# Altium PCB ZCTX-31main190715.PcbDoc (part 2 of 2)
Units mil, origin at the board's own origin, x right, y up, seen from the top; angles counter-clockwise.
Board outline 3653.54 x 5905.51 mil, 4 copper layers (Top Layer, GND, Mid-Layer 1, Bottom Layer); 117 components, 93 nets, 498 pads, 925 vias.
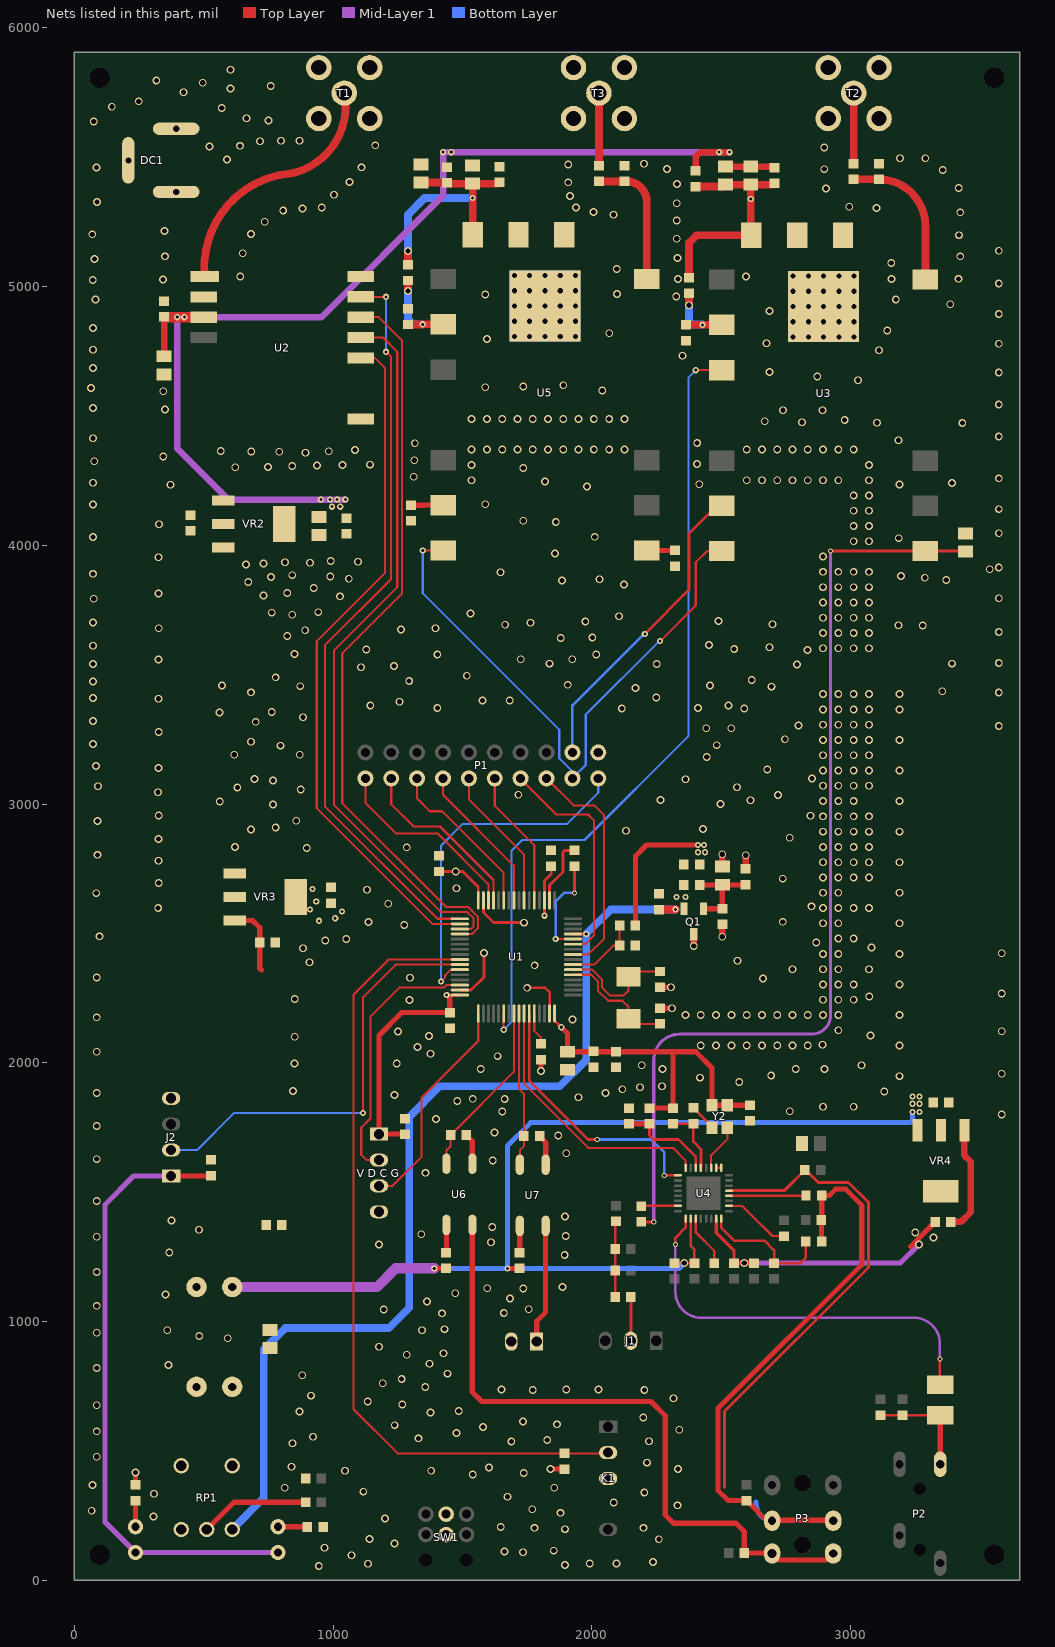
[diagram p4: the nets of this part, all layers, seen from the top]

## Via types
v1: diameter 30, hole 20, Top Layer to Bottom Layer, tented both sides, 854 vias
v2: diameter 24, hole 12, Top Layer to Bottom Layer, 61 vias
v3: diameter 20, hole 12, Top Layer to Bottom Layer, tented both sides, 10 vias

## Nets (pads, with @x,y where several pads share a name; then routed paths per layer and width w, separated by ;. In a path a pad name is that pad's centre, name@x,y a point inside that pad or via, vN(x,y) a via of type N, cw(c..) or ccw(c..) an arc to the next point about the centre after c; other vN are vias at no path point) (continued)
GND: "V D C G.4" C1.1 C2.1 C3.2 C4.1 C5.1 C6.1 C7.2 C8.1 C9.2 C10.2 C11.2 C12.2 C13.2 C14.1 C16.1 C17.1 C18.2 C26.1 C27.1 C29.1 C30.1 C31.2 C36.2 C37.2 C38.2 C39.1 C40.2 C41.2 C42.2 C43.2 C44.2 C45.2 C46.2 C47.2 C49.2 C51.1 C54.1 C55.1 C56.1 C57.2 C58.1 C59.1 Cp1.1 Cp2.1 DC1.2 DC1.3 J2.4 K1.3 P1.20 Q1.3 R3.1 R4.2 R8.2 R10.2 R11.1 R18.1 R19.1 R21.1 RP1.11 S1.2 SW1.2 SW1.5 T1.2 T2.2 T3.2 U1.18 U1.31 U1.47 U1.63 U2.2 U2.9 U2.16 U3.9 U3.10 U5.9 U5.10 U6.3 U7.3 VR2.1 VR3.1 VR4.1 Y2.2 | length 2310.7
  Top Layer w10: v1(1750,2290) 1820,2290 1836.61,2273.39 U1.63@1836.61,2190.94 ; C26.1@2392,1826.31 2464.47,1753.84 Y2.2@2464.47,1749.69
  Top Layer w11: U1.47@1490.16,2281.5 1533.46,2281.5 1583,2331.03 v1(1583,2425) ; U1.31@1580.71,2627.95 1580.71,2580.71 1619.42,2542 v1(1738,2542) ; U1.18@1836.61,2627.95 1836.61,2686.7 1888,2738.09 1888,2815.61 1893.71,2821.32 R8.2@1933,2821.32
  Top Layer w20: R18.1@236.22,368.9 v1(236.22,417.32) ; C44.2@1514.57,1720.47 1538.19,1696.85 1538.19,1673.23 U6.3@1538.19,1610.24 ; C47.2@1798.03,1716.54 1821.65,1692.91 1821.65,1673.23 ; v1(1803.15,1968.5) R4.2@1803.15,2012.99 ; U7.3@1821.65,1606.3 1821.65,1673.23 ; 1822.83,1673.23 1821.65,1673.23 ; v1(1839.76,430.31) C4.1@1893.7,430.31 ; Cp2.1@2263.78,2211.42 v1(2309.84,2211.42) ; Cp1.1@2263.78,2292.52 v1(2305.91,2292.52)
  Top Layer w25: v1(2394.02,2451.82) Q1.3@2394.02,2497.09 ; v1(2504.26,2487.25) R3.1@2504.26,2535.68 ; C6.1@2504.26,2758.51 v1(2504.26,2806.15) ; C17.1@2515.75,5464.17 C18.2@2614.17,5464.17 ; C5.1@2594.81,2749.85 v1(2594.81,2802.21) ; 2676.77,5464.17 C18.2@2614.17,5464.17 ; C41.2@2706,5459.32 2701.14,5464.17 C18.2@2614.17,5464.17 ; C42.2@3387.31,1385.45 3426.45,1385.45 3464,1423 3464,1618 3439.67,1642.33 VR4.1@3439.67,1739.78
  other v1: 945,56 1896,59 1135,64 1992,65 2095,65 2236,71 1071,97 1734,109 1662,112 1853,115 967,126 1237,143 2259,159 1141,160 1896,198 1778,203 2200,203 1648,206 1201,239 306,247 1879,261 67,269 1770,275 2331,290 2085,301 1674,323 308,335 2203,340 1117,343 813,358 1855,358 70,369 1540,409 1737,415 1046,424 1379,424 2333,431 1603,436 839,439 2213,455 87,478 843,530 1689,537 2221,538 1828,543 1330,549 922,555 1477,570 87,576 2338,582 1579,593 1238,600 1865,603 1734,614 2199,630 1377,649 870,653 1486,655 87,677 1267,680 1134,691 2316,704 915,714 1772,736 2203,736 1651,738 1901,738 2026,738 1356,747 1192,762 1265,778 881,793 1442,799 87,821 364,832 1373,837 1285,872 1427,878 1177,903 593,936 483,944 87,957 359,967 1344,967 1431,971 1421,1032 1660,1033 1196,1047 1756,1048 87,1061 1363,1078 1684,1089 352,1105 1472,1110 1735,1128 1596,1129 1887,1134 87,1192 1895,1258 367,1267 1177,1298 1610,1307 87,1328 1899,1331 1341,1338 482,1355 1615,1366 376,1391 1896,1406 87,1466 1357,1575 1617,1623 87,1628 1901,1651 1870,1719 1624,1731 87,1756 1398,1783 3584,1801 1654,1812 2765,1813 2893.7,1830.71 3011.81,1830.71 1480,1853 1663,1860 1540,1861 1948,1867 1237,1876 87,1884 2053,1884 3129.92,1889.76 844.8,1891.52 2118,1898 2186,1906 2271,1910 2570,1926 2418,1943 3188.98,1948.82 2693,1951 3584,1958 1571,1976 2273,1976 2788,1976 2899,1976 2193,1991 3042,1991 850.74,1998 1246,1998 1636,2026 1377,2035 87,2043 1326,2061 2421.26,2066.93 2480.32,2066.93 2539.37,2066.93 2598.43,2066.93 2657.48,2066.93 2716.54,2066.93 2775.59,2066.93 2834.65,2066.93 3188.98,2066.93 2891,2070 852,2101 1371,2104 3077,2106 1251,2121 3584,2122 2952.76,2125.98 1925,2168 87,2176 2362.2,2185.04 2421.26,2185.04 2480.32,2185.04 2539.37,2185.04 2598.43,2185.04 2657.48,2185.04 2716.54,2185.04 2775.59,2185.04 2834.65,2185.04 2893.7,2185.04 2952.76,2185.04 3188.98,2185.04 1295,2243 2893.7,2244.09 2952.76,2244.09 3011.81,2244.09 852,2247 3072,2257 3584,2268 2893.7,2303.15 2952.76,2303.15 3011.81,2303.15 3188.98,2303.15 2662,2326 1297,2329 87,2330 2775.59,2362.2 2893.7,2362.2 2952.76,2362.2 3070.87,2362.2 1779,2377 909,2389 2563,2395 2893.7,2421.26 2952.76,2421.26 3188.98,2421.26 3584,2424 884,2443 3081,2446 2867,2465 970,2473 1051,2479 2952.76,2480.32 3011.81,2480.32 97,2489 1275,2533 2893.7,2539.37 2952.76,2539.37 3188.98,2539.37 1137,2544 2738,2545 324,2599 2893.7,2598.43 2952.76,2598.43 3011.81,2598.43 3070.87,2598.43 2849,2605 1213,2615 85,2656 2893.7,2657.48 2952.76,2657.48 3188.98,2657.48 1131,2669 1477,2675 326,2695 2738,2712 2893.7,2716.54 2952.76,2716.54 3011.81,2716.54 3070.87,2716.54 2893.7,2775.59 2952.76,2775.59 3011.81,2775.59 3070.87,2775.59 3188.98,2775.59 325,2781 90,2804 898,2830 1285,2833 621,2834 2893.7,2834.65 2952.76,2834.65 3011.81,2834.65 3070.87,2834.65 325,2865 2765,2870 2893.7,2893.7 2952.76,2893.7 3011.81,2893.7 3070.87,2893.7 3188.98,2893.7 2132,2897 683,2902 2430,2904 778,2910 90,2935 858,2936 2893.7,2952.76 2952.76,2952.76 3011.81,2952.76 3070.87,2952.76 2845,2955 326,2956 768,2999 2497,3001 562,3010 2893.7,3011.81 2952.76,3011.81 3011.81,3011.81 3188.98,3011.81 2613,3015 2265,3016 2719,3035 1716,3036 323,3046 875,3057 630,3064 2561,3065 92,3069 2893.7,3070.87 2952.76,3070.87 3011.81,3070.87 3070.87,3070.87 768,3091 2362,3096 696,3097 2851,3099 2893.7,3129.92 2952.76,3129.92 3011.81,3129.92 3070.87,3129.92 3188.98,3129.92 2678,3134 325,3140 84,3147 2444,3182 2893.7,3188.98 2952.76,3188.98 3011.81,3188.98 3070.87,3188.98 618,3191 871,3191 797,3226 2483,3228 72,3232 683,3241 2893.7,3248.03 2952.76,3248.03 3011.81,3248.03 3070.87,3248.03 3188.98,3248.03 2746,3251 326,3279 2442,3293 2539,3293 3573,3302 2799,3304 2893.7,3307.09 2952.76,3307.09 3011.81,3307.09 3070.87,3307.09 701,3318 72,3321 884,3336 561,3354 763,3356 2893.7,3366.14 2952.76,3366.14 3011.81,3366.14 3070.87,3366.14 3188.98,3366.14 2116,3370 2589,3370 1403,3372 2410,3372 1144,3381 2528,3381 1257,3396 1577,3401 1683,3401 325,3407 72,3410 2249,3412 2893.7,3425.2 2952.76,3425.2 3011.81,3425.2 3070.87,3425.2 3188.98,3425.2 3573,3431 683,3432 3354,3436 2169,3449 2694,3454 873,3456 571,3458 2457,3458 1907,3461 72,3474 1294,3476 2618,3480 778,3490 1517,3496 1108,3529 1235,3534 2793,3540 72,3542 2251,3542 1836,3543 3392,3543 3573,3545 325,3559 1725,3560 1924,3560 1403,3578 2017,3578 851,3580 2833,3596 1128,3598 2550,3600 2893.7,3602.36 2952.76,3602.36 3011.81,3602.36 3070.87,3602.36 2687,3606 72,3612 2453,3615 1880,3642 2002,3644 823,3650 2893.7,3661.42 2952.76,3661.42 3011.81,3661.42 3070.87,3661.42 3573,3665 892,3672 1263,3675 326,3680 1396,3680 3279,3690 3185,3691 1665,3693 2698,3695 1763,3701 72,3702 1975,3706 2490,3708 2893.7,3720.47 2952.76,3720.47 3011.81,3720.47 3070.87,3720.47 2105,3726 842,3732 1531,3737 763,3740 943,3742 2893.7,3779.53 2952.76,3779.53 3011.81,3779.53 3070.87,3779.53 75,3794 3573,3796 1027,3803 731,3806 325,3814 823,3816 925,3835 2893.7,3838.58 2952.76,3838.58 3011.81,3838.58 3070.87,3838.58 2124,3849 672,3858 1885,3864 3370,3866 2030,3869 1061,3871 3287,3875 760,3878 989,3880 3195,3882 842,3885 72,3890 1647,3896 2893.7,3897.64 2952.76,3897.64 3011.81,3897.64 3070.87,3897.64 3538,3908 3573,3915 663,3926 731,3930 911,3933 814,3935 1096,3937 991,3940 325,3954 2893.7,3956.69 1858,3969 3011.81,4015.75 3070.87,4015.75 3186,4028 72,4032 2011,4033 3573,4047 3011.81,4074.8 3070.87,4074.8 327,4082 1861,4090 1735,4095 3011.81,4133.86 3070.87,4133.86 3573,4140 72,4158 1588,4159 3011.81,4192.91 3070.87,4192.91 1981,4228 372,4234 3189,4235 2415,4236 3392,4241 72,4242 1819,4247 1535.43,4251.97 2598.43,4251.97 2657.48,4251.97 2716.54,4251.97 2775.59,4251.97 2834.65,4251.97 2893.7,4251.97 2952.76,4251.97 3070.87,4251.97 3573,4259 1312,4265 1735,4299 622,4302 748,4303 842,4307 938,4309 1036,4311 1143,4312 1535.43,4311.02 3070.87,4311.02 2406,4315 77,4325 1314,4329 344,4343 893,4358 792,4362 684,4363 983,4364 566,4365 1085,4369 1535.43,4370.08 1594.49,4370.08 1653.54,4370.08 1712.6,4370.08 1771.65,4370.08 1830.71,4370.08 1889.76,4370.08 1948.82,4370.08 2007.87,4370.08 2066.93,4370.08 2125.98,4370.08 2598.43,4370.08 2657.48,4370.08 2716.54,4370.08 2775.59,4370.08 2834.65,4370.08 2893.7,4370.08 2952.76,4370.08 3011.81,4370.08 1316,4395 2407,4396 3185,4406 72,4414 3573,4421 3432,4473 3102,4474 2812,4476 2668,4480 2977,4485 1535.43,4488.19 1594.49,4488.19 1653.54,4488.19 1712.6,4488.19 1771.65,4488.19 1830.71,4488.19 1889.76,4488.19 1948.82,4488.19 2007.87,4488.19 2066.93,4488.19 2125.98,4488.19 2739,4522 2891,4522 350,4525 72,4531 3573,4544 344,4596 2040,4599 64,4608 1588,4611 1735,4614 1890,4619 3029,4638 2871,4653 3573,4668 2687,4670 72,4686 2350,4733 3110,4754 72,4756 3573,4779 2675,4781 1595,4798 2067,4820 3142,4830 72,4840 3573,4894 2687,4906 3385,4932 82,4950 3175,4950 2326,4962 1588,4970 2097,4972 3573,5012 71,5026 343,5028 2333,5029 3158,5029 3417,5030 641,5039 2596,5039 2096,5068 3157,5091 78,5107 2331,5111 350,5117 3424,5117 651,5129 3573,5139 2328,5185 3419,5199 69,5202 683,5203 349,5215 736,5251 2328,5256 2084,5278 3424,5287 2006,5288 807,5294 882,5302 3100,5304 956,5306 1939,5306 2995,5309 2328,5322 88,5327 1916,5350 1004,5355 2905,5379 3418,5381 2329,5397 1909,5403 1063,5404 3356,5451 2898,5454 2291,5455 86,5460 1110,5461 1909,5472 2202,5475 590,5491 3191,5496 3289,5496 2898,5538 522,5542 640,5544 1163,5546 718,5562 799,5564 870,5564 75,5638 750,5642 665,5651 570,5690 145,5695 249,5716 422,5751 604,5766 759,5775 496,5788 317,5797 604,5838
I2C_CLK: U1.58 U4.16 | length 1046.8
  Top Layer w8: U1.58@1738.19,2190.94 1738.19,1919.29 1985.95,1671.53 2313.54,1671.53 2362.76,1622.31 U4.16@2362.76,1594.76
I2C_DIN: U1.59 U4.17 | length 1080.3
  Top Layer w10: U1.59@1757.87,2190.94 1757.87,1932.13 1986,1704 v3(2021,1704) ; v3(2280,1565) 2280.23,1565.23 U4.17@2333.23,1565.23
  Bottom Layer w10: v3(2021,1704) 2229,1704 ; 2259,1674 2229,1704 ; v3(2280,1565) 2280,1653 2229,1704
MCLK: U4.11 Y2.3 | length 180.8
  Top Layer w8: U4.11@2461.18,1594.76 2461.18,1643.18 2523.53,1705.53 Y2.3@2523.53,1749.69
MIC_IN: C7.1 C25.2 U3.18 | length 3817.3
  Top Layer w12: C25.2@2191,1385.69 v3(2239.32,1385.69) ; v3(2923,3978.35) 3087,3978.35 ; 3042.35,3978.35 3087,3978.35 ; C7.1@3444.88,3976.55 3443.09,3978.35 U3.18@3289.37,3978.35 3087,3978.35
  Mid-Layer 1 w12: v3(2239.32,1385.69) 2239.32,2011 cw(c2339.32,2011) 2339.32,2111 2849,2111 ccw(c2849,2185) 2923,2185 v3(2923,3978.35)
MICBIAS: C19.2 R7.2 U4.32 | length 519
  Top Layer w10: U4.32@2500.55,1397.91 2500.55,1362.47 2550.02,1313 2667,1313 2704.26,1275.74 C19.2@2704.26,1226.31 2806.32,1226.31 2827.39,1247.39 R7.2@2827.39,1310
MISO: U1.35 U2.13 | length 2826.5
  Top Layer w8: U2.13@1106.3,4803.24 1192.83,4803.24 1248.03,4748.03 1248.03,3838.58 1003.94,3594.49 1003.94,2996.06 1417.32,2582.68 1519.25,2582.68 1543.31,2558.62 1543.31,2527.56 1533.46,2517.72 U1.35@1490.16,2517.72
MOSI: U1.36 U2.14 | length 2937.1
  Top Layer w8: U2.14@1106.3,4881.98 1177.08,4881.98 1265.59,4793.46 1265.59,4761 1265.59,3850 ; 1265.59,3822.83 1265.59,3850 ; U1.36@1490.16,2498.03 1537.4,2498.03 1559.31,2519.94 1559.31,2565.25 1522.2,2602.36 1437.01,2602.36 1035.43,3003.94 1035.43,3582.68 1265.59,3812.83 1265.59,3850
NetC5_2: C5.2 C6.2 Q1.1 R2.1 R3.2 | length 343
  Top Layer w20: R2.1@2416.46,2688.04 C6.2@2504.26,2688.04 ; Q1.1@2431.43,2595.52 R3.2@2503.47,2595.52 ; R3.2@2504.26,2596.31 C6.2@2504.26,2688.04 ; C6.2@2504.26,2688.43 C6.2@2504.26,2688.04 ; C5.2@2594.81,2689.22 2593.63,2688.04 C6.2@2504.26,2688.04
NetC13_1: C13.1 R5.1 U1.7 | length 288.8
  Top Layer w8: U1.7@1927.17,2379.92 2009.84,2379.92 2067.61,2437.69 2082.68,2452.76 C13.1@2107.48,2452.76 2107.69,2452.96 R5.1@2107.69,2531
NetC14_2: C14.2 H1.1 U3.12 | length 591
  Top Layer w30: H1.1@3011.81,5414.57 C14.2@3110.24,5414.57 cw(c3108.66,5233.86) 3289.37,5232.28 ; U3.12@3289.37,5027.56 3289.37,5236.22
NetC16_2: C16.2 R6.2 U3.6 | length 303.4
  Top Layer w30: C16.2@2363,4852.32 2427.12,4852.32 v2(2427.17,4852.36) U3.6@2501.97,4852.36 ; v1(2376,4928) R6.2@2376,4973.68
  Bottom Layer w30: v1(2376,4928) 2376,4867 2389.85,4853.15 v2@2427.95,4853.15
NetC20_2: C20.2 U4.2 | length 273.4
  Top Layer w9: U4.2@2530.08,1447.12 2581.26,1447.12 2615.19,1413.19 ; 2624.57,1403.81 2615.19,1413.19 ; C20.2@2742,1330.69 2697.69,1330.69 2615.19,1413.19
NetC21_2: C21.2 U4.4 | length 297.1
  Top Layer w10: U4.4@2530.08,1486.49 C21.2@2827.17,1486.49
NetC23_2: C23.2 U4.27 | length 201
  Top Layer w9: U4.27@2402.13,1397.91 2402.13,1344.87 2473.1,1273.9 C23.2@2473.1,1226.31
NetC25_1: C25.1 U4.23 | length 142.6
  Top Layer w10: C25.1@2191,1446.31 2191.8,1447.12 U4.23@2333.23,1447.12
NetC26_2: C26.2 R23.2 U4.13 | length 261.7
  Top Layer w10: R23.2@2314,1764.68 2391,1764.68 C26.2@2392,1765.69 2392,1696 2421.81,1666.19 U4.13@2421.81,1594.76
NetC27_2: C27.2 H2.1 U5.12 | length 528.7
  Top Layer w30: H2.1@2027.56,5406.69 C27.2@2125.98,5406.69 cw(c2133.27,5327.36) 2212.6,5334.65 U5.12@2212.6,5029.53
NetC29_2: C29.2 R12.2 U5.6 | length 350.3
  Top Layer w30: C29.2@1290,4853.69 1345.81,4853.69 v2(1346.46,4854.33) U5.6@1425.2,4854.33 ; v1(1290,4983) R12.2@1290,5023.68
  Bottom Layer w30: v1(1290,4983) 1290,4873 1308.67,4854.33 v2(1346.46,4854.33)
NetC32_2: C32.2 C35.1 R13.2 R16.2 | length 306.5
  Top Layer w10: R16.2@2090.68,1180.63 2090.68,1369 ; R13.2@2089.68,1097 ccw(c2090.68,1097) R13.2@2090.68,1096 ; R13.2@2089.68,1097 ccw(c2090.68,1097) R13.2@2090.68,1096 ; R13.2@2089.68,1097 ccw(c2090.68,1097) R13.2@2090.68,1096 ; R13.2@2089.68,1097 ccw(c2090.68,1097) R13.2@2090.68,1096 ; R16.2@2089.68,1198 cw(c2089.68,1197) R16.2@2090.68,1197 ; R16.2@2089.68,1198 cw(c2089.68,1197) R16.2@2090.68,1197 ; R16.2@2089.68,1198 cw(c2089.68,1197) R16.2@2090.68,1197 ; R16.2@2089.68,1198 cw(c2089.68,1197) R16.2@2090.68,1197 ; R16.2@2089.68,1198 cw(c2089.68,1197) R16.2@2090.68,1197 ; R16.2@2089.68,1198 cw(c2089.68,1197) R16.2@2090.68,1197 ; R16.2@2089.68,1198 R16.2@2090.68,1197 ; R13.2@2090.68,1096 R16.2@2090.68,1197
NetC34_1: C34.1 C48.2 P2.4 R22.1 | length 420.9
  Top Layer w10: C34.1@3115,638.69 3345.57,638.69 cw(c3345.57,637.8) C48.2@3346.46,637.8
  Top Layer w20: P2.4@3346.46,448.82 C48.2@3346.46,637.8
NetC57_1: C57.1 FB1.1 RP1.2
NetC59_2: C59.2 R24.2 U4.14 | length 379.4
  Top Layer w10: R24.2@2223,1764.68 2223,1720 2239,1704 2335,1704 2402.13,1636.87 U4.14@2402.13,1594.76
  Top Layer w20: C59.2@2144,1764.69 R24.2@2223,1764.68
NetCp1_2: Cp1.2 U1.6 Y1.1 | length 436.9
  Top Layer w8: U1.6@1927.17,2360.24 2000.97,2360.24 2039.62,2321.59 2039.62,2291.09 2070.87,2259.84 2122.05,2259.84 2141.73,2279.53 Y1.1@2141.73,2332.68 ; Y1.1@2162.2,2353.15 Cp1.2@2263.78,2353.15
NetCp2_2: Cp2.2 U1.5 Y1.2 | length 433.5
  Top Layer w8: U1.5@1927.17,2340.55 1998.03,2340.55 2023.62,2314.96 2023.62,2279.53 2062.99,2240.16 2114.17,2240.16 2118.11,2240.16 2141.73,2216.54 Y1.2@2141.73,2171.26 ; Y1.2@2162.2,2150.79 Cp2.2@2263.78,2150.79
NetD1_2: D1.2 R19.2 | length 113.5
  Top Layer w20: D1.2@787.4,207.48 900.2,207.48 R19.2@900.68,207
NetD2_2: D2.2 R18.2 | length 100.8
  Top Layer w20: D2.2@236.22,207.48 R18.2@236.22,308.27
NetDC1_1: DC1.1 RP1.1
NetH1_2: H1.2 T2.1 | length 272.8
  Top Layer w30: H1.2@3011.81,5475.2 T2.1@3011.81,5748.03
NetH2_2: H2.2 T3.1 | length 280.7
  Top Layer w30: H2.2@2027.56,5467.32 T3.1@2027.56,5748.03
NetJ1_2: J1.2 R13.1 | length 172.6
  Top Layer w10: J1.2@2150.57,926 2151.31,926.74 R13.1@2151.31,1096 ; R13.1@2151.31,1096 ccw(c2151.31,1095.26) 2150.57,1095.26 cw(c2151.31,1095.26) R13.1@2151.31,1096
NetR4_1: R4.1 U1.60 | length 127.9
  Top Layer w8: U1.60@1777.56,2190.94 1777.56,2124.02 1803.15,2098.43 R4.1@1803.15,2073.62
NetR8_1: R8.1 U1.12 | length 402.8
  Top Layer w8: v2(1860.24,2478.35) U1.12@1927.17,2478.35
  Top Layer w10: v3(1933,2657) R8.1@1933,2760.69
  Bottom Layer w10: v2(1860.24,2478.35) 1860.24,2624.24 1893,2657 v3(1933,2657)
NetR10_1: R10.1 U5.18 | length 109.4
  Top Layer w20: U5.18@2212.6,3980.32 2283.46,3980.32 R10.1@2322,3980.31
NetR11_2: R11.2 U5.2 | length 123.3
  Top Layer w20: R11.2@1302,4155.32 1352.17,4155.32 1352.36,4155.51 U5.2@1425.2,4155.51
NetR14_1: R14.1 U6.1 | length 102.4
  Top Layer w20: R14.1@1438.19,1271.65 U6.1@1438.19,1374.02
NetR15_1: R15.1 U7.1 | length 102.4
  Top Layer w20: R15.1@1721.65,1267.72 U7.1@1721.65,1370.08
NetR30_1: R30.1 RP1.12 | length 425.4
  Top Layer w20: RP1.12@511.81,196.85 616.96,302 R30.1@893.69,302
NetS1_1: S1.1 U7.2 | length 461.4
  Top Layer w19.68: S1.1@1787,923 1787,1001.96 1821.65,1036.61 U7.2@1821.65,1370.08
NetT1_1: T1.1 U2.1 | length 990.4
  Top Layer w30: U2.1@503.94,5039.46 cw(c868.07,5072.88) 834.65,5437.01 ccw(c783.46,5696.85) T1.1@1043.31,5748.03
NetU4_9: U4.9 U4.10 | length 19.7
  Top Layer w8: U4.10@2480.87,1594.76 U4.9@2500.55,1594.76
NSS: U1.33 U2.15 | length 2882.8
  Top Layer w8: U2.15@1106.3,4960.72 v2@1204.64,4960.72 ; v2(1204.72,4748.03) 1224.41,4728.35 1224.41,3870.08 968.5,3614.17 968.5,2992.13 1403.54,2557.09 U1.33@1490.16,2557.09
  Bottom Layer w8: v2(1204.72,4748.03) v2(1204.72,4960.63)
OUTR: C48.1 U4.25 | length 1600.3
  Top Layer w10: v3(2323,1298) 2323,1324 2362.76,1363.76 U4.25@2362.76,1397.91 ; v3(3345,855) C48.1@3345,757.36 ; U4.25@2362.76,1397.91 ccw(c2362.53,1397.68) 2362.53,1398 cw(c2362.53,1397.68) U4.25@2362.76,1397.91 ; C48.1@3345,757.36 ccw(c3346.46,757.36) C48.1@3346.46,755.91 ; C48.1@3345,757.36 ccw(c3346.46,757.36) C48.1@3346.46,755.91 ; C48.1@3345,757.36 C48.1@3346.46,755.91
  Mid-Layer 1 w10: v3(2323,1298) 2323,1115 ccw(c2423,1115) 2423,1015 3245,1015 cw(c3245,915) 3345,915 v3(3345,855)
PPT_IN: C15.2 P3.3 U6.2 | length 2593.1
  Top Layer w20: U6.2@1538.19,1374.02 1538.19,727.81 1575,691 2229,691 2284,636 2284,253 2316,221 2557,221 2589.37,188.63 C15.2@2589.37,106.3 2694.88,106.3 P3.3@2696.85,104.33 2722.44,78.74 2907.48,78.74 P3.3@2933.07,104.33
PPT_IN1: C47.1 U1.57 U7.4 | length 599
  Top Layer w8: U1.57@1718.5,2190.94 1718.5,1899.61 1737.4,1880.71 C47.1@1737.4,1716.54 1737.4,1678.35 1721.65,1662.6 U7.4@1721.65,1606.3
PPT_IN2: C44.1 U1.56 U6.4 | length 688.7
  Top Layer w8: U6.4@1438.19,1610.24 1438.19,1662.6 1453.94,1678.35 C44.1@1453.94,1720.47 1698.82,1965.35 U1.56@1698.82,2190.94
PPT_OUT: U1.54 U3.5 | length 3160.7
  Top Layer w8: v2(1659.45,2127.95) U1.54@1659.45,2190.94 ; v2(2401.57,4677.17) U3.5@2501.97,4677.17
  Bottom Layer w8: v2(1659.45,2127.95) 1688.98,2157.48 1688.98,2818.98 1731.25,2861.25 1971.48,2861.25 2374.02,3263.78 2374.02,4649.61 v2(2401.57,4677.17)
R1: P1.1 U1.30 | length 763.2
  Top Layer w8: P1.1@1124.8,3099.61 1124.8,3005.12 1244.09,2885.83 1405.51,2885.83 1600.39,2690.94 U1.30@1600.39,2627.95
R2: P1.3 U1.29 | length 695.3
  Top Layer w8: P1.3@1224.8,3099.61 1224.8,2999.61 1311.02,2913.39 1413.39,2913.39 1620.08,2706.69 U1.29@1620.08,2627.95
R3: P1.5 U1.27 | length 637.9
  Top Layer w8: P1.5@1324.8,3099.61 1324.8,3021.65 1374.02,2972.44 1421.26,2972.44 1659.45,2734.25 U1.27@1659.45,2627.95
R4: P1.7 U1.25 | length 585.2
  Top Layer w8: P1.7@1424.8,3099.61 1424.8,3035.83 1698.82,2761.81 U1.25@1698.82,2627.95
R5: P1.9 U1.23 | length 560
  Top Layer w8: P1.9@1524.8,3099.61 1524.8,3018.5 1738.19,2805.12 U1.23@1738.19,2627.95
R6: P1.11 U1.21 | length 534.9
  Top Layer w8: P1.11@1624.8,3099.61 1624.8,2993.31 1777.56,2840.55 U1.21@1777.56,2627.95
R7: P1.13 U1.11 | length 891.4
  Top Layer w8: P1.13@1724.8,3099.61 1724.8,3097.16 1861.96,2960 1985,2960 2007.87,2937.13 2007.87,2492.13 1974.41,2458.66 U1.11@1927.17,2458.66
R8: P1.15 U1.9 | length 903.4
  Top Layer w8: P1.15@1824.8,3099.61 1929.4,2995.01 2008.99,2995.01 2047.24,2956.76 2047.24,2480.31 1986.22,2419.29 U1.9@1927.17,2419.29
RXD: P1.19 U1.43 | length 1368.7
  Top Layer w8: v2(1417.32,2314.96) 1433.07,2330.71 1433.07,2338.58 1454.72,2360.24 U1.43@1490.16,2360.24
  Bottom Layer w8: v2(1417.32,2314.96) 1417.32,2840.32 1499.84,2922.84 1903.16,2922.84 2024.8,3044.49 P1.19@2024.8,3099.61
SCK: U1.34 U2.12 | length 2659.4
  Top Layer w8: U2.12@1106.3,4724.5 1161.33,4724.5 1201.08,4684.75 1201.08,3893.99 937.01,3629.92 937.01,2984.25 1383.86,2537.4 U1.34@1490.16,2537.4
SQ: P1.17 U3.1 U5.1 | length 2371.2
  Top Layer w8: v2(1346.46,3980.32) U5.1@1425.2,3980.32 ; P1.17@1924.8,3099.61 P1.17@1924.8,3122.44 ; v2(2263.78,3629.92) 2401.57,3767.72 2401.57,3934.57 2445.35,3978.35 U3.1@2501.97,3978.35
  Bottom Layer w8: v2(1346.46,3980.32) 1346.46,3814.96 1850.4,3311.02 1874.02,3287.4 1874.02,3177.17 1924.8,3126.38 P1.17@1924.8,3099.61 1976.38,3151.18 1976.38,3346.46 v2@2259.84,3629.92
SWD: "V D C G.2" U1.46 | length 1022
  Top Layer w8: 1177.17,1624.41 1129.59,1624.41 1109,1645 1109,1750 1144,1785 1144,2007.7 1144,2179 1255.96,2290.96 1427.26,2290.96 1437.48,2301.18 U1.46@1490.16,2301.18
TXD: J2.2 U1.42 | length 1676
  Top Layer w8: v2(1116,1806) 1116,2254 1241.92,2379.92 U1.42@1490.16,2379.92
  Bottom Layer w8: J2.2@374.02,1662.99 474.02,1662.99 618.11,1807.09 v2@1116,1807.09
V_RF1: C17.2 C18.1 C41.1 R6.1 R20.1 U3.8 | length 891
  Top Layer w30: R6.1@2376,5034.31 2376,5101 2376,5143 2376,5170 2404.82,5198.82 U3.8@2616.14,5198.82 ; R20.1@2401,5386.69 2508.34,5386.69 C17.2@2515.75,5394.09 C18.1@2614.17,5394.09 ; U3.8@2614.17,5200.79 v2(2614.17,5338.58) C18.1@2614.17,5394.09 ; C41.1@2706,5398.69 2701.41,5394.09 C18.1@2614.17,5394.09
V_RF2: C30.2 C31.1 C36.1 R12.1 R17.1 U5.8 | length 978.1
  Top Layer w30: R12.1@1290,5084.31 v1(1290,5138) ; C31.1@1339,5401.96 1438.72,5401.96 R17.1@1440,5400.69 ; R17.1@1437.01,5398.03 C30.2@1539.37,5398.03 ; U5.8@1539.37,5200.79 C30.2@1539.37,5398.03 ; C36.1@1644,5402.69 1639.35,5398.03 C30.2@1539.37,5398.03
  Bottom Layer w30: v1(1290,5138) 1290,5279 1353.52,5342.52 v2(1539.37,5342.52)
VBAT: C24.2 C37.1 C43.1 C45.1 C46.1 C49.1 C50.2 FB1.2 R14.2 R15.2 U4.26 VR2.3 VR3.3 VR4.3 | length 4551.6
  Top Layer w10: C50.2@2319,1226.31 v1(2357,1226.31) C24.2@2396.05,1226.31 2396.05,1277.95 2382.44,1291.56 2382.44,1375 ; 2382.44,1341.61 2382.44,1375 ; U4.26@2382.44,1397.91 2382.44,1375
  Top Layer w20: VR3.3@619.72,2550.7 688.3,2550.7 716.68,2522.32 C49.1@716.68,2465 716.68,2365.32 723,2359 ; v2(1390.94,1205.91) R14.2@1437.01,1205.91 ; v2(1674.41,1205.91) R15.2@1720.47,1205.91
  Mid-Layer 1 w40: C45.1@610.24,1133.86 1169.86,1133.86 1241.91,1205.91 v2(1390.94,1205.91)
  Bottom Layer w20: v2(1390.94,1205.91) v2(1674.41,1205.91) ; v1(2357,1226.31) 2336.59,1205.91 v2(1674.41,1205.91) ; v2(3238.88,1810.65) 3238.88,1777 3230.88,1769 1764,1769 1674.41,1679.41 v2(1674.41,1205.91)
  other v2: 3266.44,1810.65 3238.88,1842.14 3266.44,1842.14 3238.88,1869.7 3266.44,1869.7
VCC: C2.2 C3.1 C38.1 C39.2 R17.2 R20.2 U2.3 VR2.2 | length 4231.9
  Top Layer w25: C2.2@346,4731.04 346.94,4731.98 C3.1@346.94,4881.98 ; R20.2@2401,5447.32 2401,5502 2418.68,5519.69 v2(2531.5,5519.69)
  Top Layer w39.37: C3.1@346.94,4881.98 U2.3@500,4881.98
  Mid-Layer 1 w25: v2(1047.24,4177.17) v2(1015.75,4177.17) v2(988.19,4177.17) v2(952.76,4177.17) 594.83,4177.17 397.64,4374.36 v2(397.64,4881.89) v2(425.2,4881.89) 954.89,4881.89 1425.2,5352.2 v2(1425.2,5519.69) v2(1456.69,5519.69) v2(2492.13,5519.69) v2(2531.5,5519.69)
  other v2: 996.06,4149.61 1027.56,4149.61
VDD: "V D C G.1" C8.2 C9.1 C10.1 C11.1 C12.1 C40.1 C54.2 C55.2 C56.2 C58.2 D1.1 D2.1 J2.1 R1.2 R5.2 R23.1 R24.1 U1.19 U1.32 U1.48 U1.64 VR3.2 Y2.1 Y2.4 | length 5641.4
  Top Layer w11: C10.1@1409,2739.69 1501.32,2739.69 1561.02,2679.98 U1.32@1561.02,2627.95 ; v2(1438.98,2261.81) U1.48@1490.16,2261.81 ; v2(1816.93,2568.9) U1.19@1816.93,2627.95 1816.93,2704 1843,2730.07 C11.1@1843,2760.69 ; U1.64@1856.3,2190.94 1856.3,2163.39 v2(1881.89,2137.8)
  Top Layer w20: J2.1@374.02,1562.99 C55.2@524.8,1562.99 ; C56.2@1279,1724.69 1177.44,1724.69 1177.17,1724.41 1177.17,2106.17 1265.32,2194.32 C9.1@1451,2194.32 1451,2249.79 v2(1438.98,2261.81) ; v2(1881.89,2137.8) 1905.51,2114.17 1905.51,2091 ; 1905.51,2078.35 1905.51,2091 ; R5.2@2168.32,2531 2168.32,2798.32 2211.58,2841.58 v2(2409.77,2841.58) ; R24.1@2223,1825.31 R23.1@2314,1825.31 2314,2043.31 ; C54.2@2611,1836.31 Y2.4@2523.53,1836.31 Y2.1@2464.47,1836.31 2464.47,1980.53 2401.68,2043.31 2314,2043.31 ; 1905.51,2091 C8.2@1905.51,2043.31 C12.1@2094,2043.31 2314,2043.31
  Mid-Layer 1 w20: J2.1@374.02,1562.99 228.99,1562.99 118,1452 118,225.7 D2.1@236.22,107.48 D1.1@787.4,107.48
  Bottom Layer w11: v2(1438.98,2261.81) v2@1439.76,2261.02
  Bottom Layer w20: 1175.98,1723.23 1177.17,1724.41
  other v1: 1474,2739.69
  other v2: 946,2549 1008,2559 1034,2585 911,2593 935,2624 921,2672 2409.77,2814.02 2437.33,2814.02 2433.39,2841.58
VDDA: C51.2 Q1.2 R1.1 R2.2 RP1.13 U1.13 | length 3873
  Top Layer w11: U1.13@1927.17,2498.03 v2(1978.35,2498.03)
  Top Layer w30: C51.2@2259,2592.69 2322.29,2592.69 v2(2323.16,2593.55)
  Bottom Layer w30: RP1.13@610.24,196.85 732.28,318.9 732.28,892.28 815,975 1215.16,975 1294.11,1053.95 1294.11,1791.11 1412.45,1909.45 1876.45,1909.45 1978.35,2011.35 v2(1978.35,2498.03) ; v2@1979.13,2498.82 2072.83,2592.52 2322.13,2592.52 v2(2323.16,2593.55)
  other v2: 2327.09,2640.8 2362.53,2640.8
VEE: C28.2 C42.1 C53.2 U4.31 VR4.2 | length 1115.7
  Top Layer w12: U4.31@2480.87,1397.91 2480.87,1343.13 2550.16,1273.84 C28.2@2550.16,1226.31
  Top Layer w20: C28.2@2550.16,1226.31 v1(2589,1226.31) C53.2@2627.21,1226.31 ; 3232.19,1290.96 C42.1@3326.68,1385.45
  Mid-Layer 1 w20: v1(2589,1226.31) 3192.32,1226.31 v1(3264,1298)
  other v1: 3320,1325 3250,1345
VOLC: C4.2 K1.2 U1.41 | length 3125.4
  Top Layer w8: U1.41@1490.16,2399.61 1215.61,2399.61 1078.74,2262.74 1078.74,661.42 1249.21,490.94 C4.2@1893.7,490.94 2060.24,490.94 K1.2@2062.99,493.7
VOX_DET: P1.18 U3.2 | length 1207.3
  Top Layer w10: v2(2204.72,3657.48) 2376,3828.76 2376,4045.29 2484.25,4153.54 U3.2@2501.97,4153.54
  Bottom Layer w10: P1.18@1924.8,3199.61 1924.8,3381.5 v2@2204.72,3661.42
WCK: "V D C G.3" U1.49 | length 856
  Top Layer w8: 1177.17,1524.41 1229.13,1524.41 1342.52,1637.8 1342.52,1866.14 1561.02,2084.65 U1.49@1561.02,2190.94
WM8978MIC_N: C22.2 U4.5 | length 1937.6
  Top Layer w12: 2513,359 2513,653.23 3069,1209.23 3069,1460.77 2991.77,1538 2874.92,1538 C22.2@2837.62,1575.29 ; U4.5@2530.08,1506.17 2743.86,1506.17 C22.2@2823.68,1586
WM8978MIC_P: C21.1 C33.1 P3.2 R7.1 R9.2 | length 2301.2
  Top Layer w20: P3.2@2694.88,232.28 2931.1,232.28 P3.2@2933.07,230.31 ; P3.2@2696.85,230.31 2676.38,230.31 C33.1@2598.43,308.27 2526.96,308.27 2487,348.23 2487,664 3043,1220 3043,1450 2981,1512 2942.33,1512 2917.33,1487 C21.1@2888.32,1487 2888.32,1394.29 R9.2@2887.02,1393 R7.1@2887.02,1311
  Bottom Layer w20: 2635.04,303.15 ccw(c2700.98,296.26) P3.2@2694.09,230.32
pads on no net: J2.3 K1.1 K1.5 P2.0 P2.3 P2.5 P3.0 SW1.7 SW1.8 U1.1 U1.2 U1.3 U1.4 U1.14 U1.44 U1.45 U1.50 U1.53 U1.55 U1.61 U2.4 U2.5 U2.6 U2.7 U2.8 U2.10 U2.11 U3.4 U3.7 U3.11 U3.13 U3.14 U3.15 U4.6 U4.7 U4.8 U4.15 U4.19 U4.21 U4.22 U4.29 U4.30 U5.4 U5.5 U5.7 U5.11 U5.13 U5.14 U5.15

## Polygon pours and split planes (outlines as drawn)
AGND on Top Layer "Top Layer-No Net" (solid, remove dead copper, pour order 1001): 1960,1732 1988,1760 3694,1760 3694,-44 3689,-49 3674,-64 2357,-64 2357,768 2240,768 1952,768 1952,830 1952,1741.16 1964.84,1754 1971.84,1761 2119,1761
GND on Top Layer "Top Layer-No Net" (solid, remove dead copper, pour order 1000): -121,-36 -98,-13 2355,-13 2355,756 1943,756 1943,1754 2092,1754 2092,1733 2092,1725 2760,1725 2761,1724 2761,1668 2761,1631 2821,1631 2841,1631 2841,1649 2841,1755 2841.53,1755.53 3376.68,1755.53 3376.68,1670.68 3375,1669 3570,1669 3720,1669 4172,2121 4172,6861 -196,6861 -738,6319 -121,5702 -121,-36
VDDA on Top Layer "Top Layer-No Net" (solid, remove dead copper, pour order 22): 2307.41,2782.53 2307.41,2680.17 2307.41,2577.8 2319.22,2565.99 2323.16,2562.06 2346.78,2562.06 2366.46,2562.06 2374.34,2569.93 2378.28,2573.87 2378.28,2688.04 2378.28,2794.34 2370.4,2802.21 2358.59,2802.21 2315.28,2802.21 2307.41,2794.34 2307.41,2782.53
VDD on Top Layer "Top Layer-No Net" (solid, remove dead copper, pour order 20): 2397.96,2817.96 2397.96,2743.16 2401.9,2739.22 2405.83,2735.28 2421.58,2735.28 2441.27,2735.28 2445.2,2739.22 2449.14,2743.16 2449.14,2778.59 2449.14,2845.52 2441.27,2853.39 2437.33,2857.33 2421.58,2857.33 2405.83,2857.33 2401.9,2853.39 2397.96,2849.46 2397.96,2817.96
NetDC1_1 on Top Layer "Top Layer-No Net" (solid, remove dead copper, pour order 18): 192.91,559.06 192.91,492.13 212.6,472.44 248.03,472.44 287.4,472.44 295.28,464.57 354.33,405.51 417.32,405.51 433.07,405.51 448.82,421.26 468.5,440.94 468.5,460.63 468.5,547.24 468.5,559.06 370.08,657.48 291.34,736.22 291.34,1720.47 291.34,5208.66 318.9,5236.22 342.52,5259.84 401.57,5259.84 456.69,5259.84 484.25,5287.4 500,5303.15 500,5362.2 500,5413.39 480.32,5433.07 460.63,5452.76 425.2,5452.76 326.77,5452.76 279.53,5405.51 169.29,5295.28 169.29,5279.53 169.29,582.68 192.91,559.06
NetC57_1 on Top Layer "Top Layer-No Net" (solid, remove dead copper, pour order 16): 562.99,755.91 562.99,622.05 562.99,437.01 578.74,421.26 590.55,409.45 610.24,409.45 645.67,409.45 653.54,417.32 661.42,425.2 661.42,444.88 661.42,555.12 755.91,649.61 807.09,700.79 807.09,866.14 807.09,901.57 791.34,917.32 787.4,921.26 771.65,921.26 712.6,921.26 692.91,901.57 562.99,771.65 562.99,755.91
VBAT on Top Layer "Top Layer-No Net" (solid, remove dead copper, pour order 14): 566.93,1169.29 566.93,1066.93 645.67,988.19 692.91,940.94 748.03,940.94 803.15,940.94 814.96,952.76 838.58,976.38 838.58,1019.69 838.58,1244.09 807.09,1275.59 759.84,1322.83 759.84,1409.45 759.84,2409.45 748.03,2421.26 740.16,2429.13 712.6,2429.13 649.61,2429.13 614.17,2464.57 602.36,2476.38 582.68,2476.38 543.31,2476.38 531.5,2488.19 515.75,2503.94 515.75,2519.69 515.75,3787.4 606.3,3877.95 625.98,3897.64 625.98,3976.38 625.98,4003.94 614.17,4015.75 606.3,4023.62 582.68,4023.62 531.5,4023.62 503.94,4051.18 476.38,4078.74 464.57,4078.74 393.7,4078.74 366.14,4051.18 358.27,4043.31 358.27,4019.69 358.27,2240.16 472.44,2125.98 602.36,1996.06 602.36,1602.36 602.36,1480.31 578.74,1456.69 566.93,1444.88 566.93,1169.29
VEE on Top Layer "Top Layer-No Net" (solid, remove dead copper, pour order 12): 3317.62,1755.53 3317.62,1653.17 3274.32,1609.86 3250.69,1586.24 3250.69,1546.87 3250.69,1389.39 3238.88,1377.57 3219.2,1357.89 3219.2,1298.83 3219.2,1288.2 3224.31,1283.09 3232.19,1275.21 3262.5,1275.21 3305.81,1275.21 3333.37,1302.77 3349.12,1318.52 3349.12,1365.76 3349.12,1409.07 3360.93,1420.88 3372.74,1432.69 3392.43,1432.69 3412.11,1432.69 3423.92,1444.5 3427.86,1448.44 3427.86,1468.13 3427.86,1601.98 3392.43,1637.42 3376.68,1653.17 3376.68,1708.28 3376.68,1779.15 3368.8,1787.02 3364.87,1790.96 3353.06,1790.96 3325.5,1790.96 3321.56,1787.02 3317.62,1783.09 3317.62,1755.53
VDD on Top Layer "Top Layer-No Net" (solid, remove dead copper, pour order 10): 569.64,2656.25 569.64,2620.82 573.57,2616.88 577.51,2612.94 605.07,2612.94 699.56,2612.94 731.06,2581.45 778.3,2534.2 825.54,2534.2 1022.39,2534.2 1042.08,2553.89 1053.89,2565.7 1053.89,2585.39 1053.89,2620.82 1046.02,2628.69 1038.14,2636.57 1018.46,2636.57 963.34,2636.57 951.53,2648.38 935.78,2664.13 935.78,2687.75 935.78,2734.99 920.03,2750.74 912.16,2758.61 872.79,2758.61 758.61,2758.61 719.24,2719.24 672,2672 620.82,2672 585.39,2672 569.64,2656.25
VBAT on Top Layer "Top Layer-No Net" (solid, remove dead copper, pour order 8): 3286.13,1889.39 3234.94,1889.39 3215.26,1869.7 3215.26,1830.33 3215.26,1712.22 3231.01,1696.47 3234.94,1692.54 3254.63,1692.54 3278.25,1692.54 3282.19,1696.47 3286.13,1700.41 3286.13,1716.16 3286.13,1802.77 3290.06,1806.71 3301.87,1818.52 3313.68,1818.52 3333.37,1818.52 3337.31,1822.46 3341.24,1826.39 3341.24,1838.2 3341.24,1877.57 3329.43,1889.39 3286.13,1889.39
VCC on Top Layer "Top Layer-No Net" (solid, remove dead copper, pour order 6): 523.62,4094.49 523.62,4066.93 531.5,4059.06 535.43,4055.12 559.06,4055.12 681.1,4055.12 728.35,4007.87 767.72,3968.5 822.83,3968.5 866.14,3968.5 877.95,3980.32 893.7,3996.06 893.7,4007.87 893.7,4059.06 909.45,4074.8 917.32,4082.68 937.01,4082.68 1066.93,4082.68 1078.74,4094.49 1086.61,4102.36 1086.61,4122.05 1086.61,4165.35 1078.74,4173.23 1059.06,4192.91 1019.68,4192.91 751.97,4192.91 673.23,4114.17 669.29,4110.24 645.67,4110.24 531.5,4110.24 527.56,4106.3 523.62,4102.36 523.62,4094.49
GND on Bottom Layer "Top Layer-No Net" (solid, remove dead copper, pour order 1003): -296,-68 -281,-53 2362,-53 2362,755 2359,758 2357,760 1956,760 1956,1746 1962,1740 3685,1740 3685,6105 3561,6229 3544,6212 -65,6212 -65,111 -228,-52
AGND on Bottom Layer "Top Layer-No Net" (solid, remove dead copper, pour order 1002): 3653.54,1733 1962,1733 1960,1731 1958.29,1729.29 1958.29,771.29 2361.33,771.29 2365.81,766.81 2370.29,762.33 2370.29,20.39 3648.94,20.39 3653.54,25 3653.54,1732
VCC on Bottom Layer "Top Layer-No Net" (solid, remove dead copper, pour order 30): 1409.45,5523.62 1409.45,5444.88 1417.32,5437.01 1444.88,5437.01 1464.57,5437.01 1468.5,5440.94 1476.38,5448.82 1476.38,5476.38 1476.38,5523.62 1464.57,5535.43 1444.88,5535.43 1421.26,5535.43 1409.45,5523.62
VCC on Bottom Layer "Top Layer-No Net" (solid, remove dead copper, pour order 28): 2472.44,5515.75 2472.44,5456.69 2472.44,5448.82 2480.32,5440.94 2507.87,5440.94 2539.37,5440.94 2547.24,5448.82 2551.18,5452.76 2551.18,5500 2551.18,5527.56 2539.37,5539.37 2519.68,5539.37 2484.25,5539.37 2472.44,5527.56 2472.44,5515.75
VDD on Mid-Layer 1 "Top Layer-No Net" (solid, remove dead copper, pour order 1000): 552.5,2852.5 554.5,2854.5 1871.5,2854.5 2460.5,2854.5 2479.5,2835.5 2478.5,2834.5 2478.5,2800.5 2478.5,2757.5 2462.5,2741.5 2457.5,2736.5 2347.5,2736.5 2149.5,2736.5 2121.5,2708.5 2050.5,2637.5 2050.5,2364.5 2050.5,2086.5 1981.5,2017.5 1972.5,2008.5 1851.5,2008.5 1391.5,2008.5 1347.5,1964.5 1321.5,1938.5 1321.5,1831.5 1321.5,1711.5 1302.5,1692.5 1285.5,1675.5 1096.5,1675.5 610.5,1675.5 575.5,1640.5 562.5,1627.5 562.5,1563.5 562.5,1547.5 515.5,1500.5 500.5,1485.5 351.5,1485.5 328.5,1485.5 309.5,1504.5 294.5,1519.5 294.5,1614.5 294.5,2701.5 445.5,2852.5 552.5,2852.5
GND on GND (split plane): 3633.45,1770.98 1940.94,1770.98 1938,1770.69 1935.18,1769.83 1932.57,1768.44 1930.29,1766.56 1928.41,1764.28 1927.02,1761.67 1926.16,1758.85 1925.87,1755.91 1925.87,757.71 1926.16,754.77 1927.02,751.94 1928.41,749.33 1930.29,747.05 1932.57,745.18 1935.18,743.78 1938,742.93 1940.94,742.64 2361.93,742.64 2361.93,20.1 20.1,20.1 20.1,5885.41 3633.45,5885.41
AGND on GND (split plane): 3633.45,20.1 2392.07,20.1 2392.07,757.71 2391.78,760.65 2390.93,763.48 2389.53,766.08 2387.66,768.37 2385.37,770.24 2382.77,771.63 2379.94,772.49 2377,772.78 1956.02,772.78 1956.02,1740.83 3633.45,1740.83

## Keep-outs
Keep-Out Layer:
  the board outline again, w10

## Other copper
Top Layer:
  rectangle net VCC: 1409,5443 1475,5536
Mid-Layer 1:
  rectangle net VCC: 927,4131 1059,4188
  rectangle net VEE: 3222,1275 3341,1367
Bottom Layer:
  rectangle net VDDA: 2309,2578 2376,2676
  rectangle net VBAT: 3215,1794 3284,1888
GND (plane layer: these items are gaps in the copper):
  lines w30: 2377,-2 2377,757.71 1940.94,757.71 1940.94,1755.91 2480.31,1755.91 2744.09,1755.91 3657,1755.91
Multi-Layer:
  pour cut-out: 397.64,5039.37 425.2,5011.81 594.49,5011.81 614.17,5031.5 614.17,5165.35 767.72,5318.9 933.07,5318.9 1129.92,5515.75 1129.92,5814.96 1106.3,5838.58 992.13,5838.58 964.57,5811.02 964.57,5606.3 893.7,5535.43 665.35,5535.43 397.64,5267.72
  pour cut-out: 1944.88,5346.46 1980.31,5311.02 2102.36,5311.02 2129.92,5283.46 2129.92,4980.31 2161.42,4948.82 2291.34,4948.82 2307.09,4964.57 2307.09,5389.76 2248.03,5448.82 2110.24,5448.82 2094.49,5464.57 2094.49,5574.8 2106.3,5586.61 2106.3,5811.02 2082.68,5834.65 1960.63,5834.65 1944.88,5818.9
  pour cut-out: 2933.07,5358.27 2952.76,5338.58 3157.48,5338.58 3196.85,5299.21 3196.85,4980.31 3220.47,4956.69 3366.14,4956.69 3385.83,4976.38 3385.83,5358.27 3287.4,5456.69 3090.55,5456.69 3078.74,5468.5 3078.74,5586.61 3094.49,5602.36 3094.49,5795.28 3059.05,5830.71 2960.63,5830.71 2933.07,5803.15

## Silkscreen, mask and mechanical layers (free items; w line width, h text height)
Top Overlay:
  lines w10: 157.48,0 157.48,5905.51 ; 3503.94,0 3503.94,5905.51
Bottom Overlay:
  text "1" at 759.84,3476.38 h393.7
  text "ZCTX-30_M1" at 811.02,3342.52 h78.74
  text "13199542131" at 826.77,3240.16 h78.74
  text "V1.8 20190715" at 854.33,3149.61 h78.74
Top Solder:
  lines w60: 72,3196 72,5048 ; 87,478 87,2330 ; 3573,3287 3573,5139
Mechanical 1:
  the board outline again, w10